# Altium PCB as5047breakout.PcbDoc
Units mm, origin at the board's own origin, x right, y up, seen from the top; angles counter-clockwise.
Board outline 30 x 30 mm, 2 copper layers (Top Layer, Bottom Layer); 24 components, 23 nets, 90 pads, 7 vias.
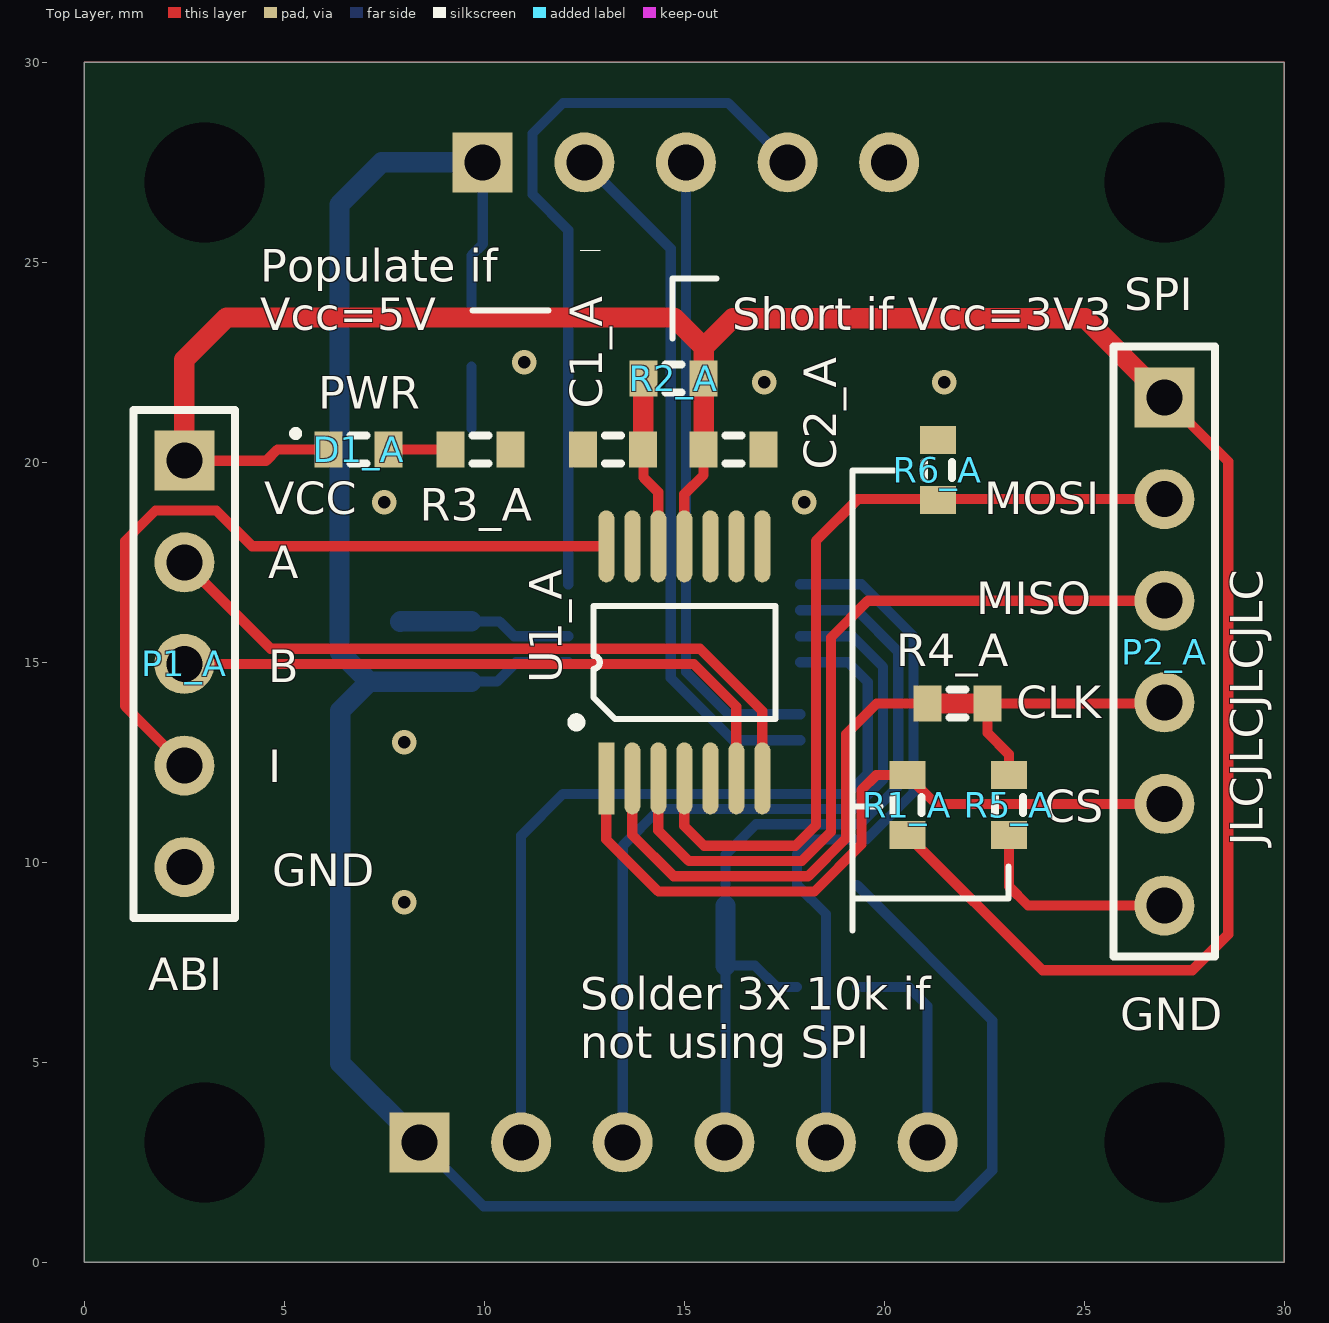
[diagram p0: Top Layer view]
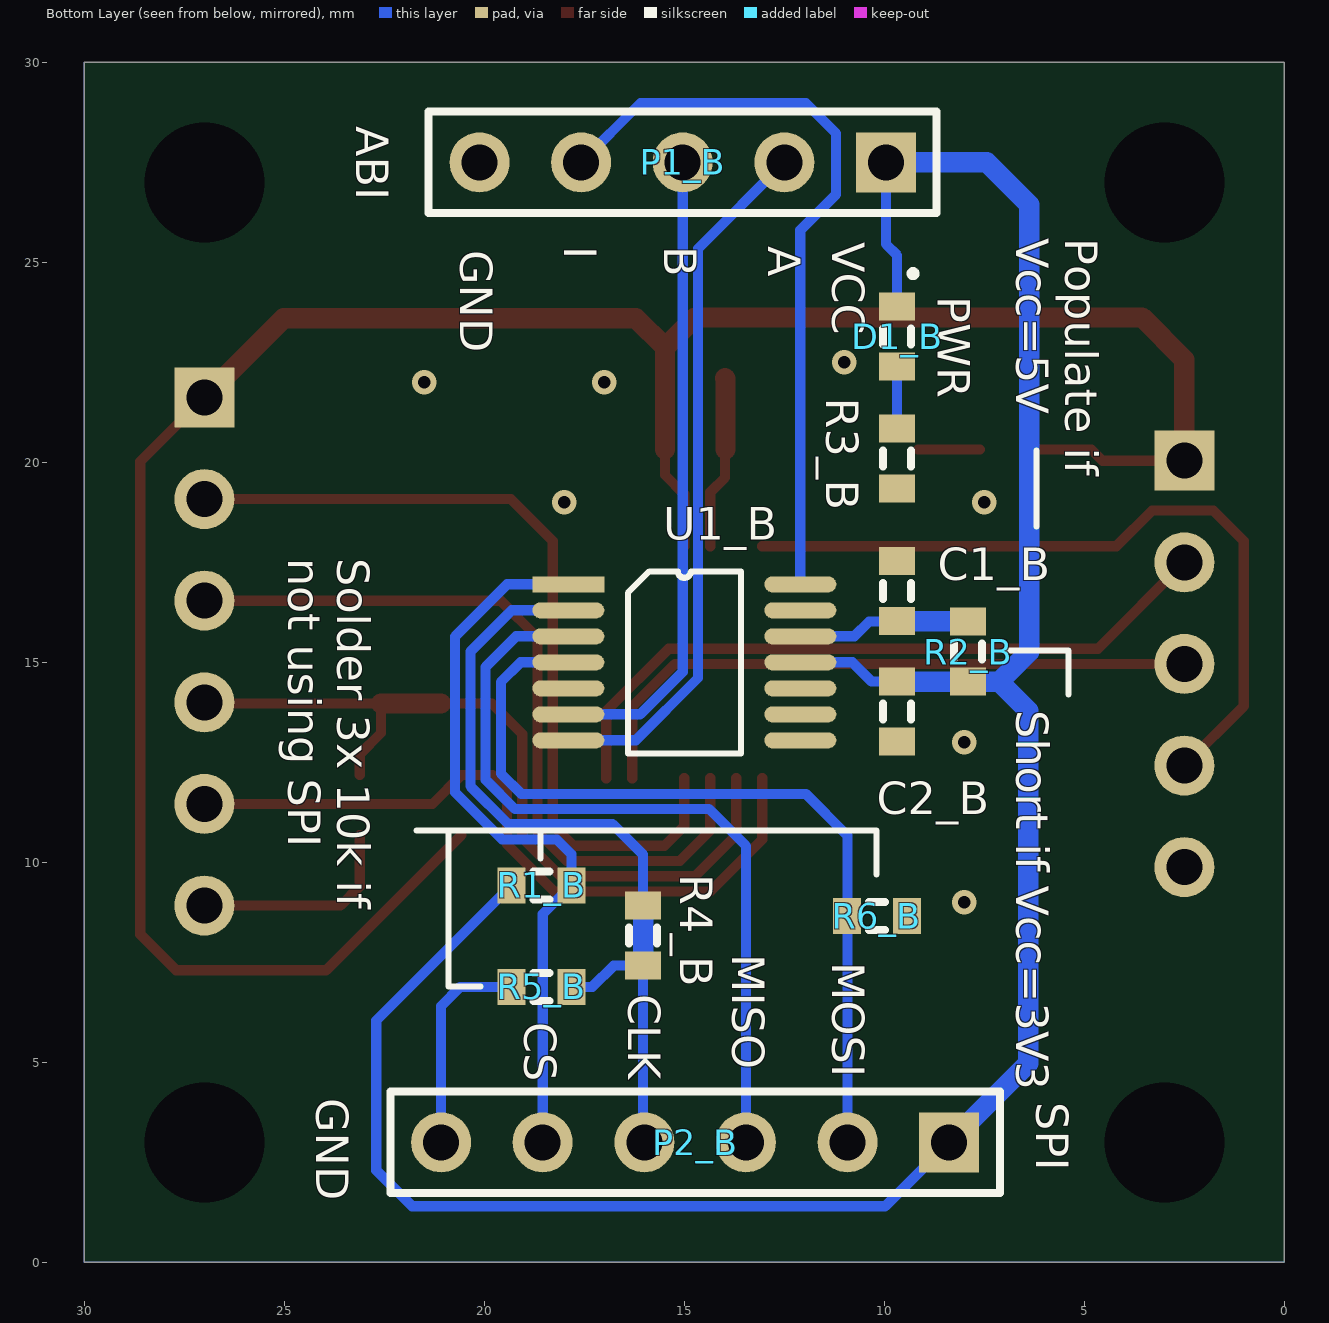
[diagram p1: Bottom Layer view, seen from below]

## Layer stack, top to bottom
Top Solder: solder mask 0.0102, Solder Resist, Dk 3.5
Top Layer: signal copper 0.0356
Dielectric 1: dielectric 0.32, FR-4, Dk 4.8
Bottom Layer: signal copper 0.0356
Bottom Solder: solder mask 0.0102, Solder Resist, Dk 3.5

## Board outline
0,0 30,0 30,30 0,30

## Design rules (kind name [scope] priority, off if disabled: settings)
Clearance [All] p1: gap=0.127 ignorepadtopadclearanceinfootprint=FALSE
PolygonConnect PolygonConnect_1 [IsVia] p1: connectstyle=Direct reliefconductorwidth=0.254 reliefentries=4 polygonreliefangle="90 Angle" airgapwidth=0.254
PolygonConnect [All] p2: connectstyle=Relief reliefconductorwidth=0.254 reliefentries=4 polygonreliefangle="90 Angle" airgapwidth=0.254
RoomDefinition B [InComponentClass('B')] p1: confinementstyle=ConfineIn formatcopy=TRUE lockcomponents=FALSE outline 30,30 30,0 0,0 0,30
RoomDefinition A [InComponentClass('A')] p2: confinementstyle=ConfineIn formatcopy=TRUE lockcomponents=FALSE outline 0,0 30,0 30,30 0,30
RoutingVias [All] p1: holewidth=0.711 width=1.27 viastyle="Through Hole" minholewidth=0.3 minwidth=0.6 maxholewidth=0.711 maxwidth=1.27
SolderMaskExpansion [All] p1: expansion=0.102
Width [All] p1: maxlimit=1.27 minlimit=0.254 preferedwidth=0.254
30 further rules are at their usual default settings.

## Classes and differential pairs
channel class as5047unit: A B

## Components (designator, comment, footprint, x,y, rotation, side; value= is the part's Value field where it differs from the comment)
C1_A "Cap" J1-0603 13.22,20.32 r0 top value=1uF (schematic designator C1)
C1_B "Cap" J1-0603 9.68,16.78 r270 bottom value=1uF (schematic designator C1)
C2_A "Cap" J1-0603 16.232,20.32 r180 top value=100nF (schematic designator C2)
C2_B "Cap" J1-0603 9.68,13.768 r90 bottom value=100nF (schematic designator C2)
D1_A "LED" "J1-0603 Polarised" 6.858,20.32 r0 top (schematic designator D1)
D1_B "LED" "J1-0603 Polarised" 9.68,23.142 r270 bottom (schematic designator D1)
P1_A "ABI" HDR1X5 2.5,20.04 r270 top locked (schematic designator P1)
P1_B "ABI" HDR1X5 9.96,27.5 r0 bottom (schematic designator P1)
P2_A "SPI" HDR1X6 27,21.62 r270 top locked (schematic designator P2)
P2_B "SPI" HDR1X6 8.38,3 r0 bottom (schematic designator P2)
R1_A "Resistor" J1-0603 20.574,11.43 r270 top value=10k (schematic designator R1)
R1_B "Resistor" J1-0603 18.57,9.426 r0 bottom value=10k (schematic designator R1)
R2_A "Resistor" J1-0603 14.732,22.098 r180 top value=0 (schematic designator R2)
R2_B "Resistor" J1-0603 7.902,15.268 r90 bottom value=0 (schematic designator R2)
R3_A "Resistor" J1-0603 9.906,20.32 r180 top value=1k (schematic designator R3)
R3_B "Resistor" J1-0603 9.68,20.094 r90 bottom value=1k (schematic designator R3)
R4_A "Solderable Link" "0603 Link" 21.832,13.97 r180 top net-tie (schematic designator R4)
R4_B "Solderable Link" "0603 Link" 16.03,8.168 r90 bottom net-tie (schematic designator R4)
R5_A "Resistor" J1-0603 23.114,11.43 r90 top value=10k (schematic designator R5)
R5_B "Resistor" J1-0603 18.57,6.886 r180 bottom value=10k (schematic designator R5)
R6_A "Resistor" J1-0603 21.336,19.812 r270 top value=10k (schematic designator R6)
R6_B "Resistor" J1-0603 10.188,8.664 r0 bottom value=10k (schematic designator R6)
U1_A "AS5047P" TSSOP-14 15,15 r90 top locked (schematic designator U1)
U1_B "AS5047P" TSSOP-14 15,15 r180 bottom (schematic designator U1)

## Footprints (in the part's own frame and the unit in brackets; to place one, negate y for a bottom-side part, rotate by r counter-clockwise, add the part's x,y. Pads: shape width x height; smd on the part's side, far side on the other; paste and mask are expansions set on the pad)
"0603 Link" [mm]
  rect 0.7x0.9 smd: 1(-0.75,0) 2(0.75,0)
  Top Layer lines w0.508: 0.75,0 -0.75,0
  silkscreen extent -0.2,-0.35 0.2,0.35, body extent -0.85,-0.48 0.85,0.48, height 0.9
HDR1X5 [mm] "Connector; Header; 5 Position"
  rect 1.5x1.5 hole 0.9: 1(0,0)
  round 1.5 hole 0.9: 2(2.54,0) 3(5.08,0) 4(7.62,0) 5(10.16,0)
  silkscreen extent -1.27,-1.27 11.43,1.27
HDR1X6 [mm] "Connector; Header; 6 Position"
  rect 1.5x1.5 hole 0.9: 1(0,0)
  round 1.5 hole 0.9: 2(2.54,0) 3(5.08,0) 4(7.62,0) 5(10.16,0) 6(12.7,0)
  silkscreen extent -1.27,-1.27 13.97,1.27
J1-0603 [mm] "Chip Resistor, Body 1.6x0.8mm, IPC High Density"
  rect 0.7x0.9 smd: 1(-0.75,0) 2(0.75,0)
  silkscreen extent -0.2,-0.35 0.2,0.35, body extent -0.85,-0.48 0.85,0.48, height 0.9
"J1-0603 Polarised" [mm] "0603 Footprint for Polarised Components"
  rect 0.7x0.9 smd: 1(-0.75,0) 2(0.75,0)
  silkscreen extent -1.61,-0.35 0.2,0.44, body extent -0.85,-0.48 0.85,0.48, height 0.9
TSSOP-14 [mm]
  rect 1.8x0.4 smd: 1(-2.9,1.95)
  oval 1.8x0.4 smd: 2(-2.9,1.3) 3(-2.9,0.65) 4(-2.9,0) 5(-2.9,-0.65) 6(-2.9,-1.3) 7(-2.9,-1.95) 8(2.9,-1.95) 9(2.9,-1.3) 10(2.9,-0.65) 11(2.9,0) 12(2.9,0.65) 13(2.9,1.3) 14(2.9,1.95)
  silkscreen extent -1.41,-2.28 1.41,2.28

## Part data
C1_A C1_B C2_A C2_B: "Capacitor"
P1_A P1_B: library part "Header 5", "Header, 5-Pin", LatestRevisionDate=17-Jul-2002, LatestRevisionNote="Re-released for DXP Platform.", Publisher="Altium Limited"
P2_A P2_B: library part "Header 6", "Header, 6-Pin", LatestRevisionDate=17-Jul-2002, LatestRevisionNote="Re-released for DXP Platform.", Publisher="Altium Limited"
R4_A R4_B: library part Link
D1_A D1_B: LatestRevisionDate=17-Jul-2002, LatestRevisionNote="Re-released for DXP Platform.", PackageDescription="SM LED; 2 Flat Leads", PackageReference=3.2X1.6X1.1, PackageVersion=Feb-2002, Published=8-Jun-2000, Publisher="Altium Limited"
R1_A R1_B R2_A R2_B R3_A R3_B R5_A R5_B R6_A R6_B: LatestRevisionDate=17-Jul-2002, LatestRevisionNote="Re-released for DXP Platform.", PackageDescription="Axial Device, Thru-Hole; 2 Leads; 0.3 in Pin Spacing", PackageReference=AXIAL-0.3, Published=8-Jun-2000, Publisher="Altium Limited"

## Free pads (board coordinates)
  round 1.524 hole 3: M1(3,27) M2(27,27) M3(27,3) M4(3,3)

## Via types
v1: diameter 0.61, hole 0.305, Top Layer to Bottom Layer, 7 vias

## Nets (pads, with @x,y where several pads share a name; then routed paths per layer and width w, separated by ;. In a path a pad name is that pad's centre, name@x,y a point inside that pad or via, vN(x,y) a via of type N, cw(c..) or ccw(c..) an arc to the next point about the centre after c; other vN are vias at no path point)
GND_A: C1_A.1 C1_B.1 C2_A.1 C2_B.1 P1_A.5 P1_B.5 P2_A.6 P2_B.6 R3_A.1 R3_B.1 R5_A.1 R5_B.1 R6_A.1 R6_B.1 U1_A.13 U1_B.13 | length 10.7
  Top Layer w0.254: R5_A.1 23.114,9.398 23.592,8.92 P2_A.6
  Bottom Layer w0.254: R5_B.1 20.602,6.886 21.08,6.408 P2_B.6
  other v1: 8,9 8,13 7.5,19 18,19 17,22 21.5,22 11,22.5
NetC1_A_2: C1_A.2 R2_A.2 U1_A.12 | length 4.4
  Top Layer w0.254: C1_A.2 13.982,20.308 13.982,19.618 14.35,19.25 U1_A.12
  Top Layer w0.508: C1_A.2 13.97,22.086 R2_A.2
NetC1_B_2: C1_B.2 R2_B.2 U1_B.12 | length 4.4
  Bottom Layer w0.254: C1_B.2 9.692,16.018 10.382,16.018 10.75,15.65 U1_B.12
  Bottom Layer w0.508: R2_B.2 7.914,16.03 C1_B.2
NetD1_A_2: D1_A.2 R3_A.2 | length 1.5
  Top Layer w0.254: D1_A.2 R3_A.2
NetD1_B_2: D1_B.2 R3_B.2 | length 1.5
  Bottom Layer w0.254: R3_B.2 D1_B.2
NetP1_A_2: P1_A.2 U1_A.7 | length 17.7
  Top Layer w0.254: P1_A.2 4.659,15.341 15.393,15.341 16.95,13.784 U1_A.7
NetP1_A_3: P1_A.3 U1_A.6 | length 16
  Top Layer w0.254: P1_A.3 15.235,14.96 16.3,13.895 U1_A.6
NetP1_A_4: P1_A.4 U1_A.14 | length 18.9
  Top Layer w0.254: P1_A.4 1.016,13.904 1.016,18.034 1.778,18.796 3.302,18.796 4.198,17.9 U1_A.14
NetP1_B_2: P1_B.2 U1_B.7 | length 17.7
  Bottom Layer w0.254: P1_B.2 14.659,25.341 14.659,14.607 16.216,13.05 U1_B.7
NetP1_B_3: P1_B.3 U1_B.6 | length 16
  Bottom Layer w0.254: P1_B.3 15.04,14.765 16.105,13.7 U1_B.6
NetP1_B_4: P1_B.4 U1_B.14 | length 18.9
  Bottom Layer w0.254: U1_B.14 12.1,25.802 11.204,26.698 11.204,28.222 11.966,28.984 16.096,28.984 P1_B.4
NetR4_A_2: R4_A.2 U1_A.2 | length 12.5
  Top Layer w0.254: U1_A.2 13.7,10.684 14.732,9.652 18.096,9.652 19.05,10.606 19.05,13.208 19.812,13.97 R4_A.2
NetR4_B_2: R4_B.2 U1_B.2 | length 12.5
  Bottom Layer w0.254: R4_B.2 16.03,10.188 16.792,10.95 19.394,10.95 20.348,11.904 20.348,15.268 19.316,16.3 U1_B.2
SPI_CLK_A: P2_A.4 R4_A.1 R5_A.2 | length 6.4
  Top Layer w0.254: R5_A.2 23.114,12.7 22.582,13.232 R4_A.1 26.97,13.97 P2_A.4
SPI_CLK_B: P2_B.4 R4_B.1 R5_B.2 | length 6.4
  Bottom Layer w0.254: P2_B.4 16.03,3.03 R4_B.1 16.768,7.418 17.3,6.886 R5_B.2
SPI_CS_A: P2_A.5 R1_A.1 U1_A.1 | length 18.3
  Top Layer w0.254: U1_A.1 13.05,10.572 14.351,9.271 18.253,9.271 19.431,10.449 19.431,11.811 19.8,12.18 R1_A.1 21.294,11.46 P2_A.5
SPI_CS_B: P2_B.5 R1_B.1 U1_B.1 | length 18.3
  Bottom Layer w0.254: U1_B.1 19.428,16.95 20.729,15.649 20.729,11.747 19.551,10.569 18.189,10.569 17.82,10.2 R1_B.1 18.54,8.706 P2_B.5
SPI_MISO_A: P2_A.3 U1_A.3 | length 19.8
  Top Layer w0.254: U1_A.3 14.35,10.796 15.113,10.033 17.938,10.033 18.669,10.764 18.669,15.621 19.588,16.54 P2_A.3
SPI_MISO_B: P2_B.3 U1_B.3 | length 19.8
  Bottom Layer w0.254: P2_B.3 13.46,10.412 14.379,11.331 19.236,11.331 19.967,12.062 19.967,14.887 19.204,15.65 U1_B.3
SPI_MOSI_A: P2_A.2 R6_A.2 U1_A.4 | length 21.2
  Top Layer w0.254: U1_A.4 15,10.908 15.494,10.414 17.78,10.414 18.288,10.922 18.288,18.034 19.334,19.08 P2_A.2
SPI_MOSI_B: P2_B.2 R6_B.2 U1_B.4 | length 21.2
  Bottom Layer w0.254: P2_B.2 10.92,10.666 11.966,11.712 19.078,11.712 19.586,12.22 19.586,14.506 19.092,15 U1_B.4
VCC_A: C2_A.2 D1_A.1 P1_A.1 P2_A.1 R1_A.2 R2_A.1 U1_A.11 | length 61.7
  Top Layer w0.254: P1_A.1 4.546,20.04 4.826,20.32 D1_A.1 ; U1_A.11 15,19.2 15.482,19.682 C2_A.2 ; R1_A.2 23.954,7.3 27.7,7.3 28.6,8.2 28.6,20.02 P2_A.1
  Top Layer w0.508: P1_A.1 2.5,22.566 3.556,23.622 14.732,23.622 15.482,22.872 ; C2_A.2 R2_A.1 15.482,22.872 ; P2_A.1 25.02,23.6 16.21,23.6 15.482,22.872
VCC_B: C2_B.2 D1_B.1 P1_B.1 P2_B.1 R1_B.2 R2_B.1 U1_B.11 | length 61.7
  Bottom Layer w0.254: P2_B.1 9.98,1.4 21.8,1.4 22.7,2.3 22.7,6.046 R1_B.2 ; C2_B.2 10.318,14.518 10.8,15 U1_B.11 ; D1_B.1 9.68,25.174 9.96,25.454 P1_B.1
  Bottom Layer w0.508: P2_B.1 6.4,4.98 6.4,13.79 7.128,14.518 ; C2_B.2 R2_B.1 7.128,14.518 ; P1_B.1 7.434,27.5 6.378,26.444 6.378,15.268 7.128,14.518
pads on no net: U1_A.5 U1_A.8 U1_A.9 U1_A.10 U1_B.5 U1_B.8 U1_B.9 U1_B.10

## Polygon pours and split planes (outlines as drawn)
GND_A on Top Layer (solid, shelved, pour order 0): 0,0 30,0 30,30 0,30
no net on Top Layer (solid, shelved, pour order 2): 0.4,19.2
GND_A on Bottom Layer (solid, shelved, pour order 4): 0,0 30,0 30,30 0,30

## Silkscreen, mask and mechanical layers (free items; w line width, h text height)
Top Overlay:
  circle w0.254: c12.3,13.5 r0.1
  lines w0: 12.4,25.3 12.9,25.3
  lines w0.152: 9.7,23.8 11.6,23.8 ; 14.7,23.1 14.7,24.6 15.8,24.6 ; 19.2,8.3 19.2,19.8 20.3,19.8 ; 19.2,9.1 23.1,9.1 23.1,9.9 ; 19.2,11.4 19.9,11.4
  text "SPI" at 26,23.8 h0.81
  text "Populate if / Vcc=5V" at 4.4,23.3 h0.81
  text "Short if Vcc=3V3" at 16.2,23.3 h0.81
  text "PWR" at 5.842,21.336 h0.81
  text "VCC" at 4.5,18.7 h0.81
  text "MOSI" at 22.5,18.7 h0.81
  text "A" at 4.6,17.1 h0.81
  text "MISO" at 22.3,16.2 h0.81
  text "B" at 4.6,14.5 h0.81
  text "CLK" at 23.3,13.6 h0.81
  text "I" at 4.6,12 h0.81
  text "CS" at 24,11 h0.81
  text "JLCJLCJLCJLC" at 29.464,10.414 h0.81 r90
  text "GND" at 4.7,9.4 h0.81
  text "ABI" at 1.6,6.8 h0.81
  text "GND" at 25.9,5.8 h0.81
  text "Solder 3x 10k if / not using SPI" at 12.4,5.1 h0.81
Bottom Overlay:
  lines w0.152: 5.4,14.2 5.4,15.3 6.9,15.3 ; 6.2,18.4 6.2,20.3 ; 10.2,9.7 10.2,10.8 21.7,10.8 ; 18.6,10.1 18.6,10.8 ; 20.1,6.9 20.9,6.9 20.9,10.8
  text "ABI" at 23.2,28.4 h0.81 r90
  text "Populate if / Vcc=5V" at 6.7,25.6 h0.81 r90
  text "VCC" at 11.3,25.5 h0.81 r90
  text "A" at 12.9,25.4 h0.81 r90
  text "B" at 15.5,25.4 h0.81 r90
  text "I" at 18,25.4 h0.81 r90
  text "GND" at 20.6,25.3 h0.81 r90
  text "PWR" at 8.664,24.158 h0.81 r90
  text "Solder 3x 10k if / not using SPI" at 24.9,17.6 h0.81 r90
  text "Short if Vcc=3V3" at 6.7,13.8 h0.81 r90
  text "MISO" at 13.8,7.7 h0.81 r90
  text "MOSI" at 11.3,7.5 h0.81 r90
  text "CLK" at 16.4,6.7 h0.81 r90
  text "CS" at 19,6 h0.81 r90
  text "GND" at 24.2,4.1 h0.81 r90
  text "SPI" at 6.2,4 h0.81 r90
Mechanical 1:
  the board outline again, w0.152